# Altium PCB PCB1.PcbDoc (part 1 of 2)
Units mm, origin at the board's own origin, x right, y up, seen from the top; angles counter-clockwise.
Board outline 69.6 x 55 mm, 4 copper layers (Top Layer 1, Top Layer, Bottom Layer, Bottom Layer 1), stack 0.534 mm thick; 132 components, 100 nets, 446 pads, 41 vias.
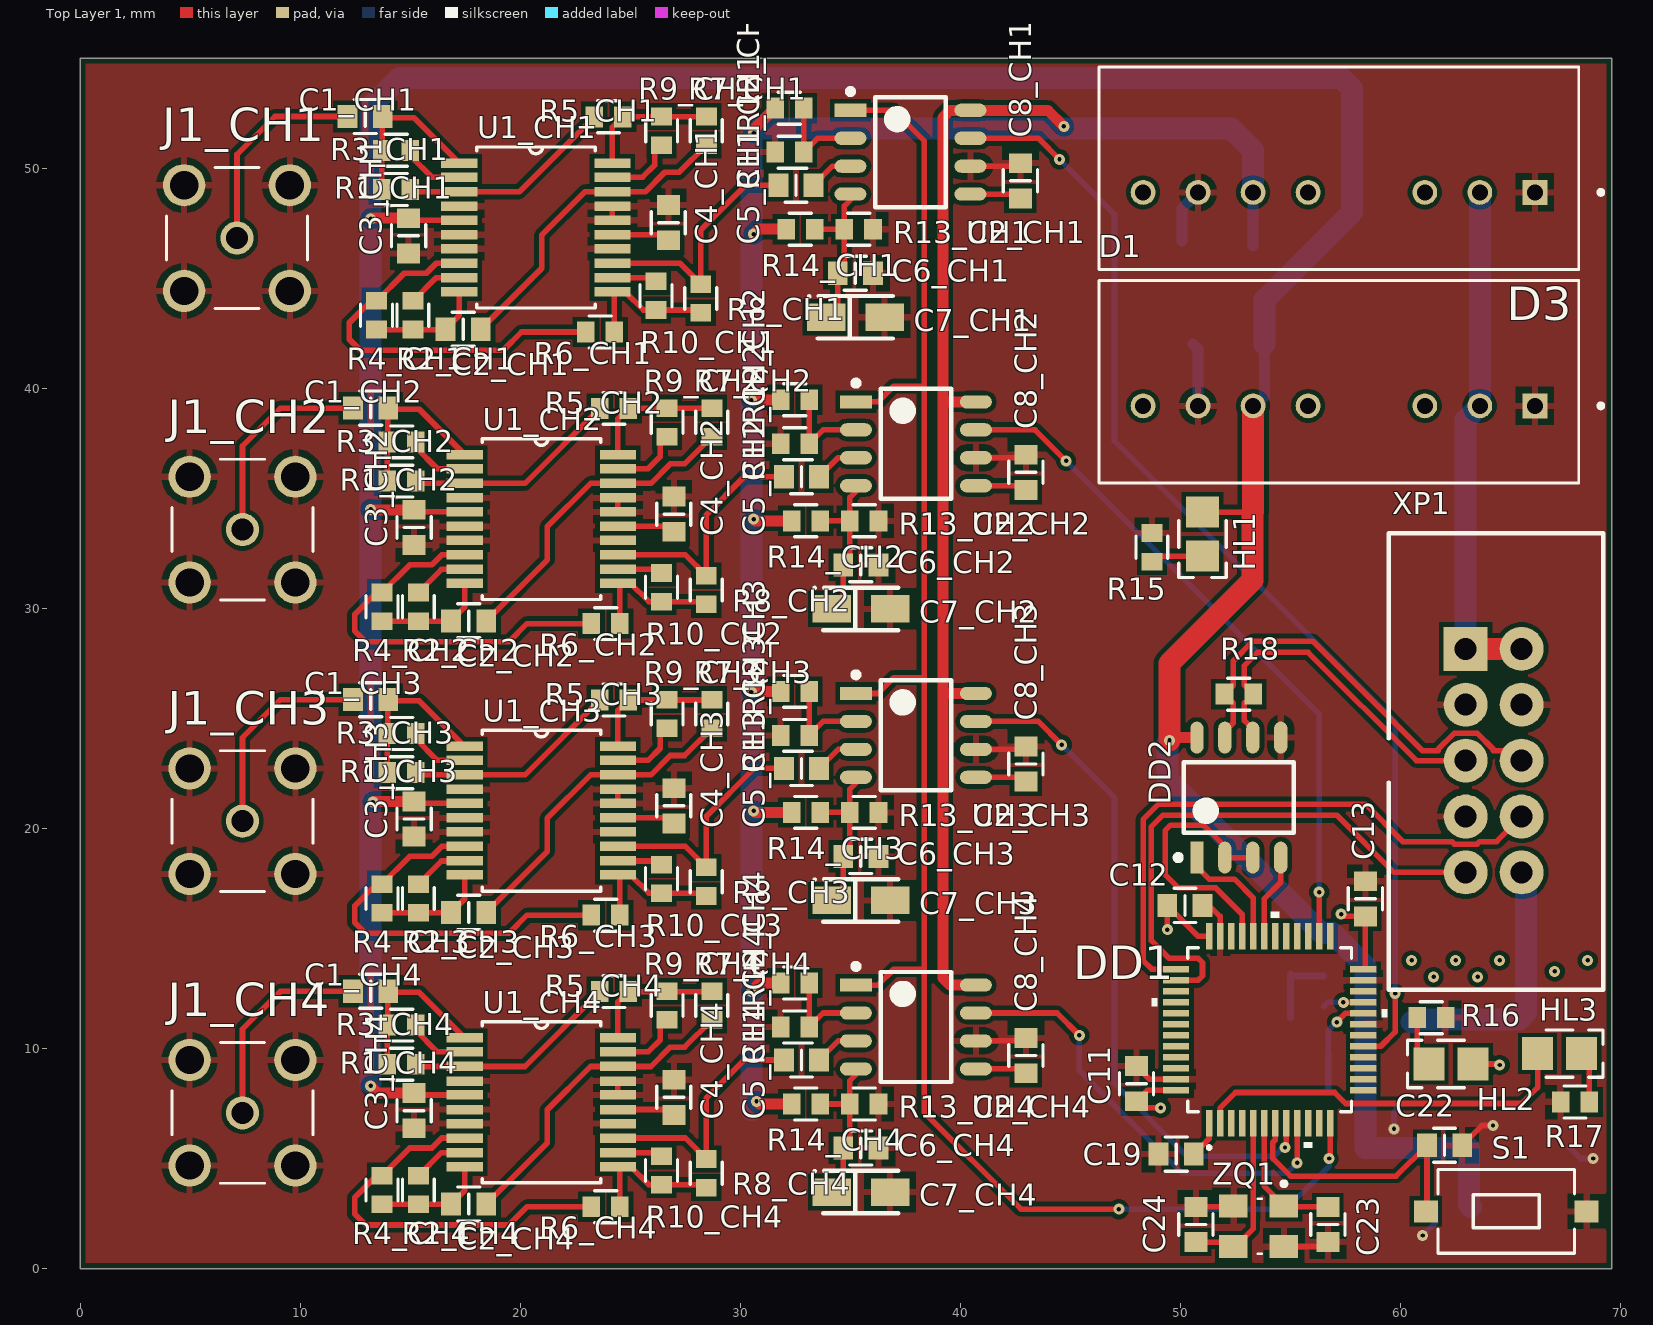
[diagram p0: Top Layer 1 view]
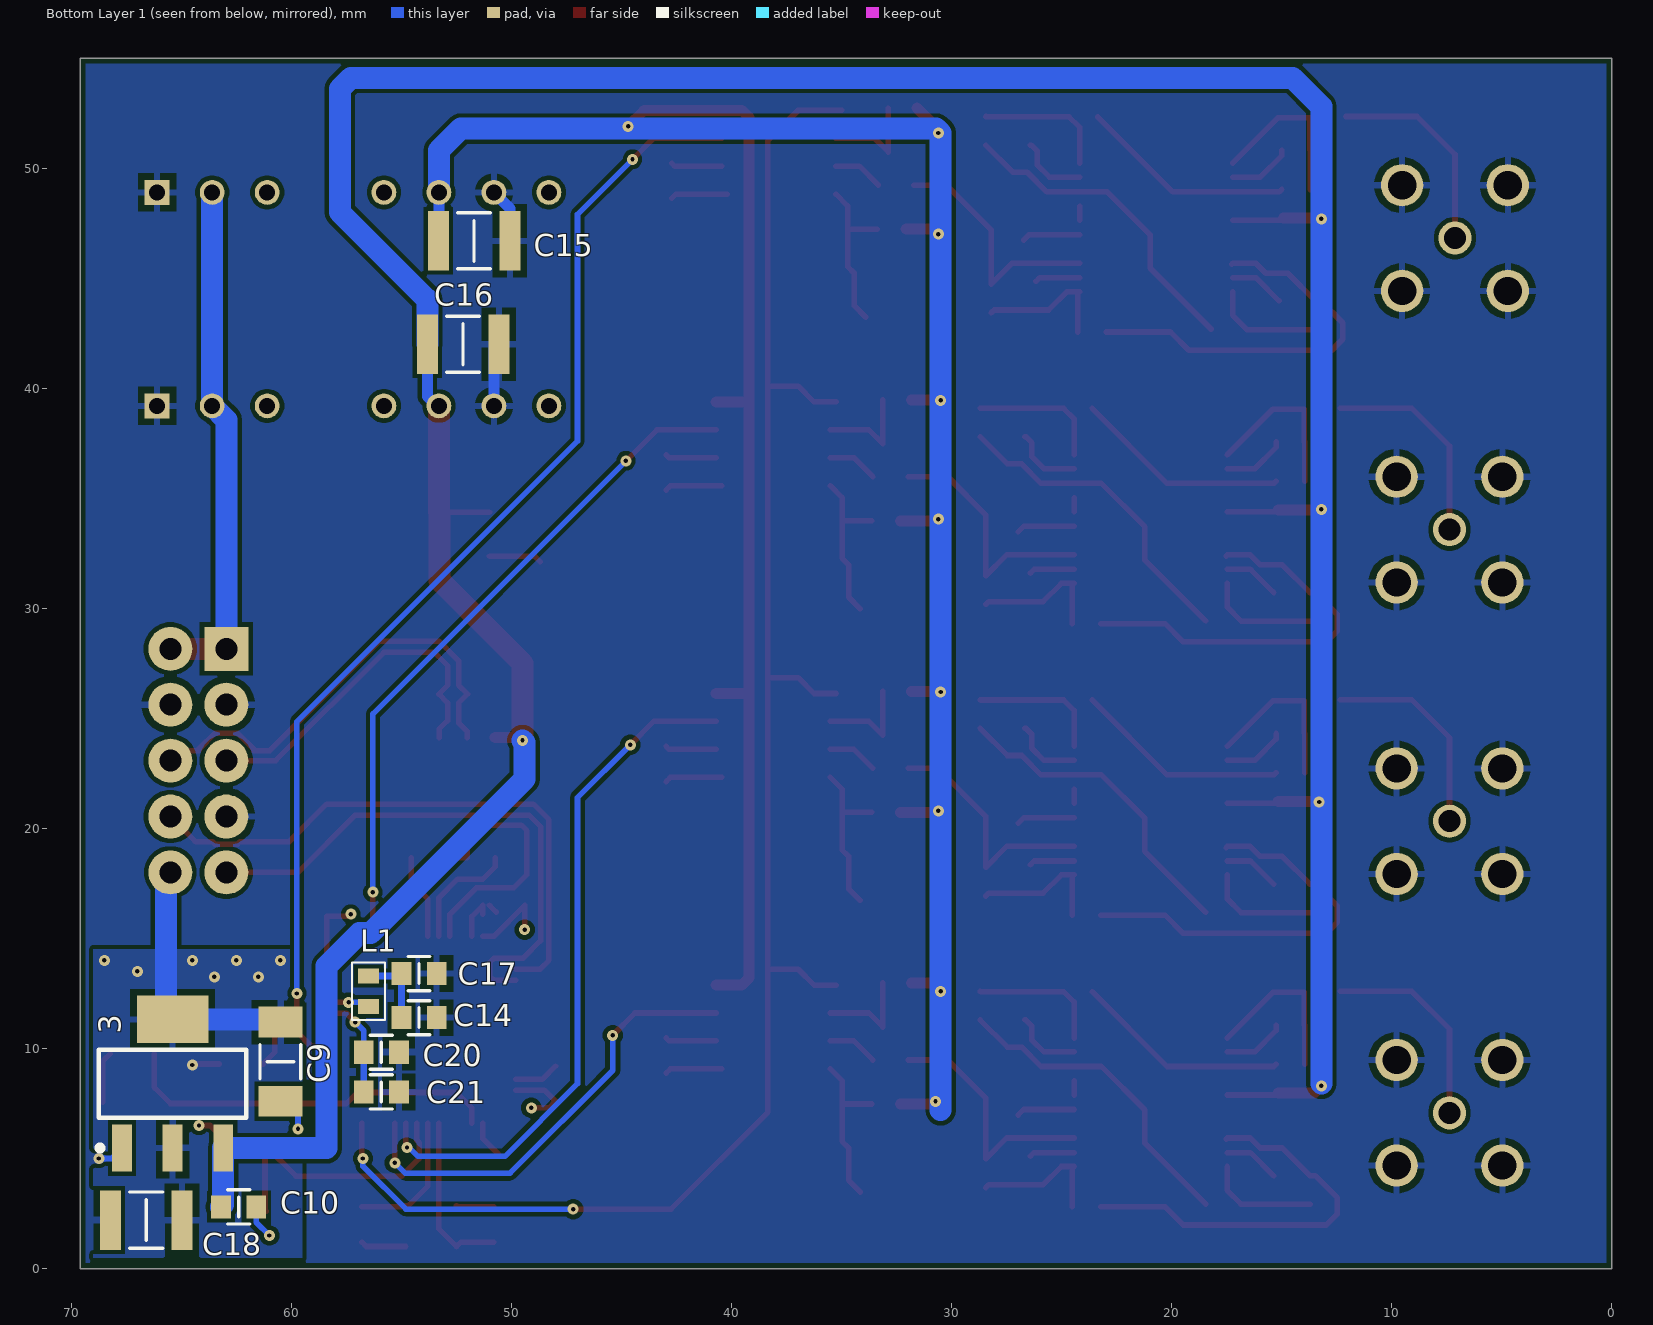
[diagram p1: Bottom Layer 1 view, seen from below]
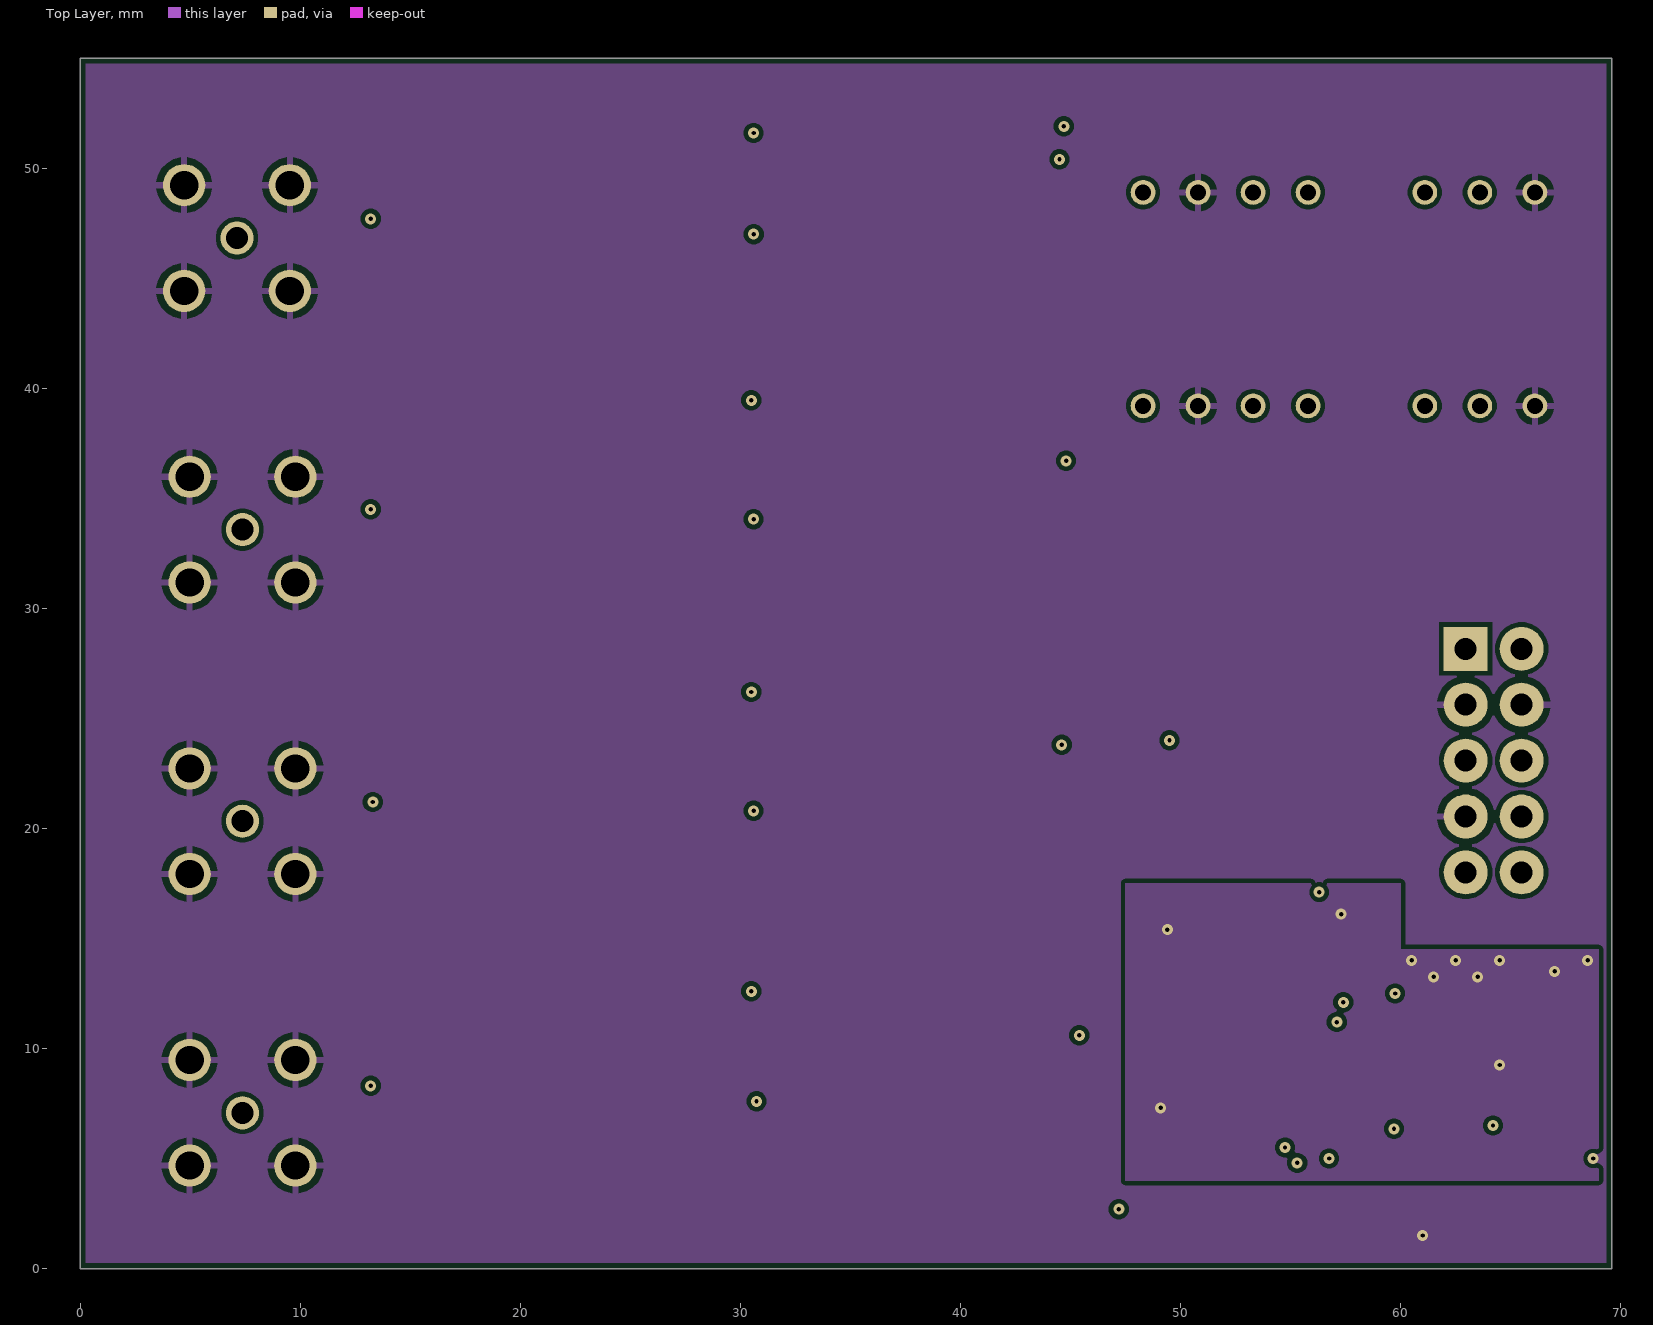
[diagram p2: Top Layer]
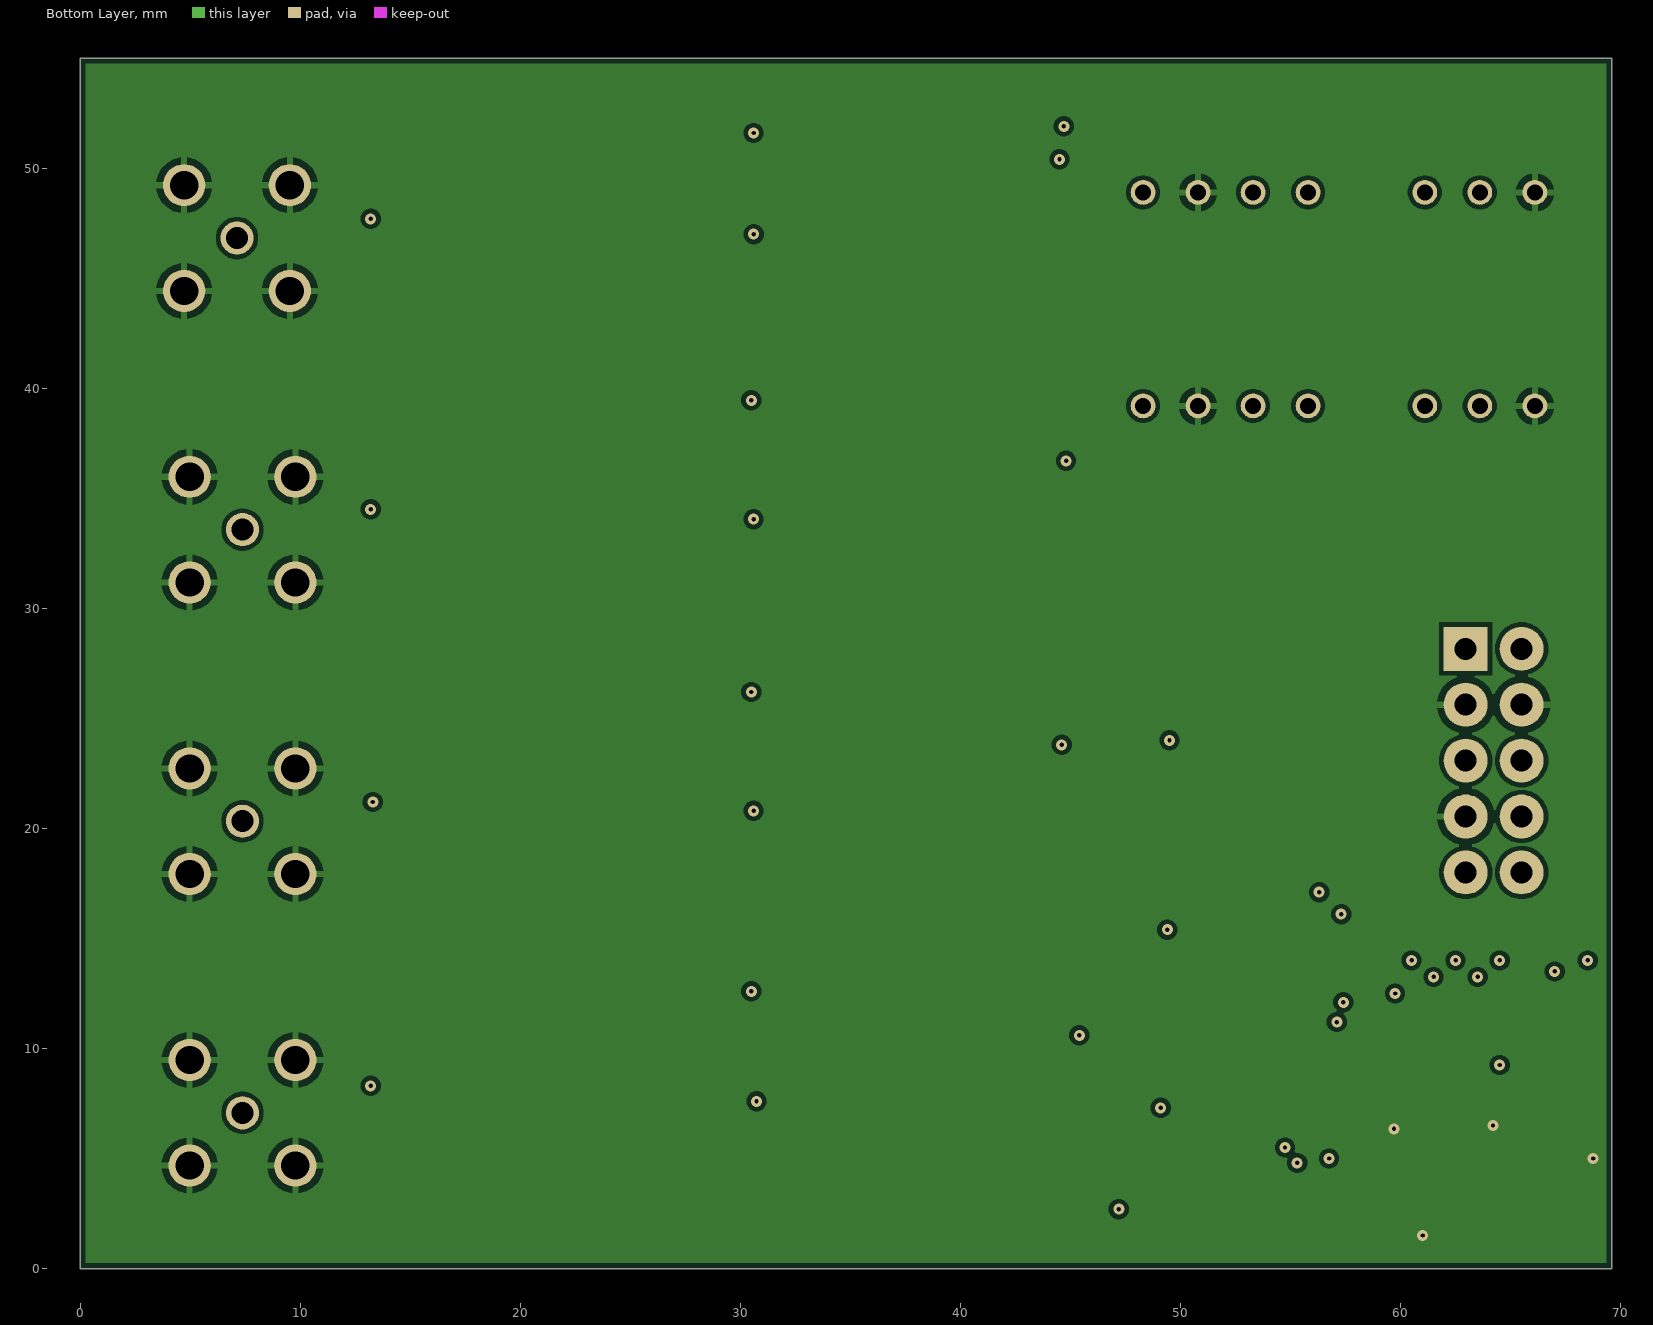
[diagram p3: Bottom Layer]
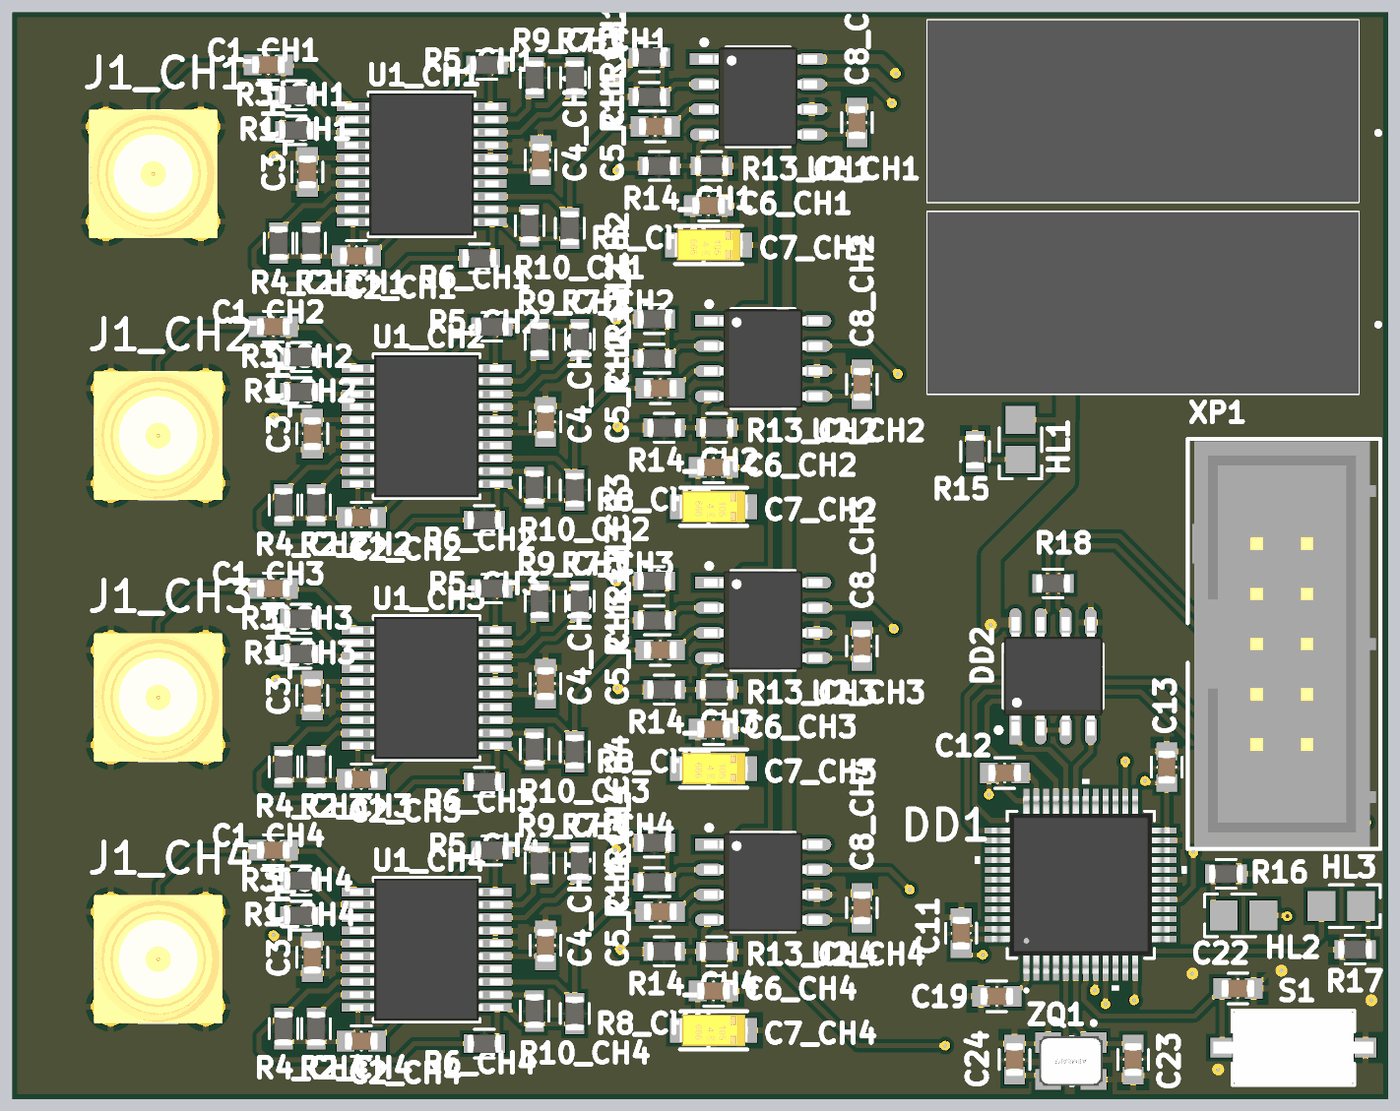
[diagram p5: 3D render of the assembled board from above, using the file's embedded part models]
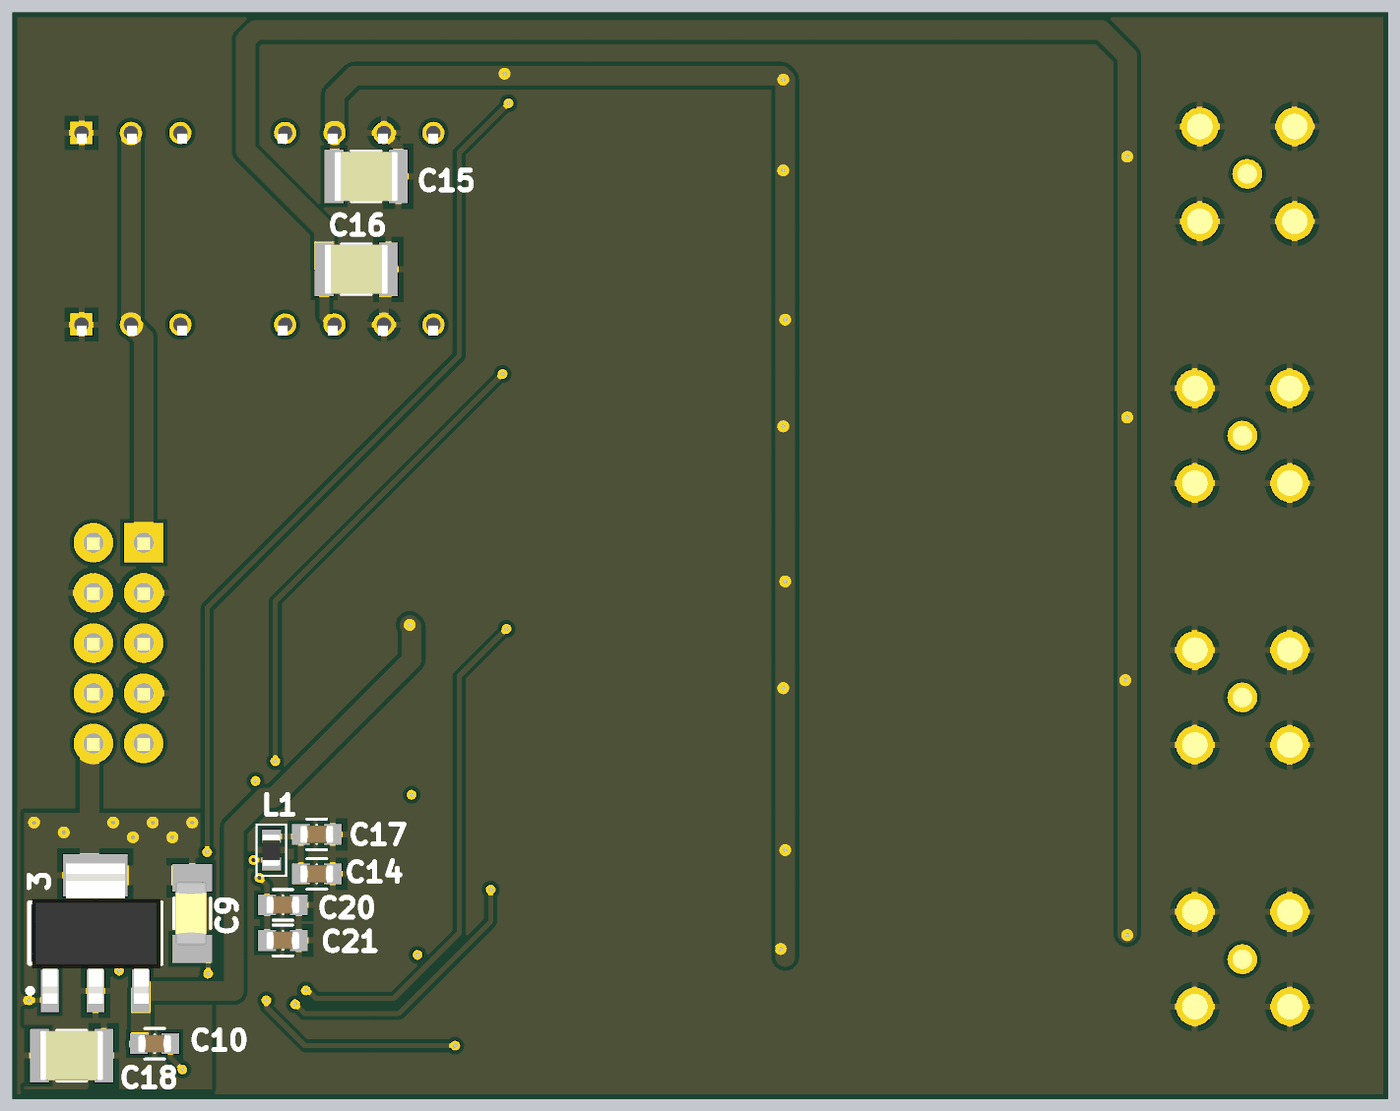
[diagram p6: 3D render of the assembled board from below, using the file's embedded part models]

## Layer stack, top to bottom
Top Solder: solder mask 0.0102, Solder Resist, Dk 3.5
Top Layer 1: signal copper 0.018
Dielectric 2: prepreg 0.0711, PP-006, Dk 4.1
Top Layer: signal copper 0.018
Dielectric 1: dielectric 0.32, FR-4, Dk 4.8
Bottom Layer: signal copper 0.018
Dielectric 3: prepreg 0.0711, PP-006, Dk 4.1
Bottom Layer 1: signal copper 0.018
Bottom Solder: solder mask 0.0102, Solder Resist, Dk 3.5

## Board outline
0,0 69.6,0 69.6,55 0,55

## Design rules (kind name [scope] priority, off if disabled: settings)
AcuteAngle [All] p1: minimum=3.50000000000000E+0001 checktracksonly=FALSE
BoardOutlineClearance "BoardOutlineClearance 1" [All] p1: gap=0.25 ignorepadtopadclearanceinfootprint=FALSE except(0: Arc-SplitContinuation Track-SplitContinuation SMDPad-SplitContinuation THPad-SplitContinuation Via-SplitContinuation Fill-SplitContinuation Poly-SplitContinuation Region-SplitContinuation Text-SplitContinuation) // Milling
BoardOutlineClearance "BoardOutlineClearance 2" [All] p2: gap=0.4 ignorepadtopadclearanceinfootprint=FALSE except(0: Arc-SplitContinuation Track-SplitContinuation SMDPad-SplitContinuation THPad-SplitContinuation Via-SplitContinuation Fill-SplitContinuation Poly-SplitContinuation Region-SplitContinuation Text-SplitContinuation) // V-Cut
Clearance "Clearance-1 1/2 Oz" [All] p1: gap=0.125 ignorepadtopadclearanceinfootprint=FALSE except(0.2: Arc-Fill Arc-Poly Track-Fill Track-Poly SMDPad-SMDPad SMDPad-Fill SMDPad-Poly THPad-Fill THPad-Poly Via-Fill Via-Poly Fill-Fill Fill-Poly Poly-Poly Poly-Region Poly-Text; 0.25: Arc-Hole Track-Hole SMDPad-Hole THPad-Hole Via-Hole Fill-Hole Poly-Hole Region-Hole Text-Hole) // Standart
DiffPairsRouting "DiffPairsRouting 1 Oz" [All] p1: maxlimit=0.254 minlimit=0.2 mostfreqgap=0.254 toplayer_minwidth=0.2 toplayer_maxwidth=0.381 toplayer_prefwidth=0.381 midlayer1_minwidth=0.2 midlayer1_maxwidth=0.381 midlayer1_prefwidth=0.381 midlayer2_minwidth=0.2 midlayer2_maxwidth=0.381 midlayer2_prefwidth=0.381 bottomlayer_minwidth=0.2 bottomlayer_maxwidth=0.381 bottomlayer_prefwidth=0.381 maxuncoupledlength=12.7
DiffPairsRouting "DiffPairsRouting 1/2 Oz" [All] p2: maxlimit=0.254 minlimit=0.1 mostfreqgap=0.254 toplayer_minwidth=0.1 toplayer_maxwidth=0.381 toplayer_prefwidth=0.381 midlayer1_minwidth=0.1 midlayer1_maxwidth=0.381 midlayer1_prefwidth=0.381 midlayer2_minwidth=0.1 midlayer2_maxwidth=0.381 midlayer2_prefwidth=0.381 bottomlayer_minwidth=0.1 bottomlayer_maxwidth=0.381 bottomlayer_prefwidth=0.381 maxuncoupledlength=12.7
HoleSize "Minimum HoleSize VIA 1" [IsVia] p1: absolutevalues=TRUE maxlimit=5.9 minlimit=0.2 maxpercent=80.000 minpercent=20.000 // Standart
HoleToHoleClearance Hole2HoleClearance [All] p1: gap=0.25 allowstackedmicrovias=FALSE
MinimumAnnularRing "Minimum AR VIA Standart" [IsVia] p1: minimumring=0.15
MinimumAnnularRing "Minimum AR PAD Standart" [IsPAD] p2: minimumring=0.2
MinimumAnnularRing "Minimum AR VIA Advance" [IsVia] p3: minimumring=0.1
MinimumAnnularRing "Minimum AR PAD Advance" [IsPAD] p4: minimumring=0.15
MinimumSolderMaskSliver "SolderMask Bridge Standart" [All] p1: minsoldermaskwidth=0.15 // All Masks
MinimumSolderMaskSliver "SolderMask Bridge Advance" [All] p2: minsoldermaskwidth=0.1 // Mask LDI
PlaneClearance "PlaneClearance 3 Oz" [All] p1 off: clearance=0.35
PlaneClearance "PlaneClearance 2 Oz" [All] p2: clearance=0.3
PlaneClearance "PlaneClearance 1 Oz" [All] p3: clearance=0.2
PlaneClearance "PlaneClearance-1 1/2 Oz" [All] p4: clearance=0.2 // Standart
PlaneClearance "PlaneClearance-2 1/2 Oz" [All] p5: clearance=0.15 // Advance
PlaneConnect "TermalConnect 3 Oz" [All] p1 off: planeconnectstyle=Relief reliefexpansion=0.2 reliefentries=4 reliefconductorwidth=0.35 reliefairgap=0.35 // Standart
PlaneConnect "TermalConnect 2 Oz" [All] p2: planeconnectstyle=Relief reliefexpansion=0.2 reliefentries=4 reliefconductorwidth=0.3 reliefairgap=0.3 // Standart
PlaneConnect "TermalConnect-1 1 Oz" [All] p3: planeconnectstyle=Relief reliefexpansion=0.2 reliefentries=4 reliefconductorwidth=0.2 reliefairgap=0.2 // Standart
PlaneConnect "TermalConnect-2 1 Oz" [All] p4: pad.planeconnectstyle=Relief pad.reliefexpansion=0.15 pad.reliefentries=4 pad.reliefconductorwidth=0.2 pad.reliefairgap=0.2 via.planeconnectstyle=Direct via.reliefexpansion=0.15 via.reliefentries=4 via.reliefconductorwidth=0.15 via.reliefairgap=0.15 // Advance
PlaneConnect "TermalConnect-1 1/2 Oz" [All] p5: planeconnectstyle=Relief reliefexpansion=0.2 reliefentries=4 reliefconductorwidth=0.2 reliefairgap=0.2 // Standart
PlaneConnect "TermalConnect-2 1/2 Oz" [All] p6: pad.planeconnectstyle=Relief pad.reliefexpansion=0.15 pad.reliefentries=4 pad.reliefconductorwidth=0.15 pad.reliefairgap=0.15 via.planeconnectstyle=Direct via.reliefexpansion=0.15 via.reliefentries=4 via.reliefconductorwidth=0.15 via.reliefairgap=0.15 // Advance
PolygonConnect "PolygonConnect 3 Oz" [All] p1 off: thpad.connectstyle=Relief thpad.reliefconductorwidth=0.35 thpad.reliefentries=4 thpad.polygonreliefangle="90 Angle" thpad.airgapwidth=0.35 smdpad.connectstyle=Relief smdpad.reliefconductorwidth=0.35 smdpad.reliefentries=4 smdpad.polygonreliefangle="90 Angle" smdpad.airgapwidth=0.35 via.connectstyle=Direct via.reliefconductorwidth=0.254 via.reliefentries=4 via.polygonreliefangle="90 Angle" via.airgapwidth=0.254
PolygonConnect "PolygonConnect 2 Oz" [All] p2: thpad.connectstyle=Relief thpad.reliefconductorwidth=0.3 thpad.reliefentries=4 thpad.polygonreliefangle="90 Angle" thpad.airgapwidth=0.3 smdpad.connectstyle=Relief smdpad.reliefconductorwidth=0.3 smdpad.reliefentries=4 smdpad.polygonreliefangle="90 Angle" smdpad.airgapwidth=0.3 via.connectstyle=Direct via.reliefconductorwidth=0.254 via.reliefentries=4 via.polygonreliefangle="90 Angle" via.airgapwidth=0.254
PolygonConnect "PolygonConnect-1 1 Oz" [All] p3: thpad.connectstyle=Relief thpad.reliefconductorwidth=0.2 thpad.reliefentries=4 thpad.polygonreliefangle="90 Angle" thpad.airgapwidth=0.2 smdpad.connectstyle=Relief smdpad.reliefconductorwidth=0.2 smdpad.reliefentries=4 smdpad.polygonreliefangle="90 Angle" smdpad.airgapwidth=0.2 via.connectstyle=Direct via.reliefconductorwidth=0.254 via.reliefentries=4 via.polygonreliefangle="90 Angle" via.airgapwidth=0.254 // Standart
PolygonConnect "PolygonConnect-2 1 Oz" [All] p4: thpad.connectstyle=Relief thpad.reliefconductorwidth=0.15 thpad.reliefentries=4 thpad.polygonreliefangle="90 Angle" thpad.airgapwidth=0.15 smdpad.connectstyle=Relief smdpad.reliefconductorwidth=0.15 smdpad.reliefentries=4 smdpad.polygonreliefangle="90 Angle" smdpad.airgapwidth=0.15 via.connectstyle=Direct via.reliefconductorwidth=0.254 via.reliefentries=4 via.polygonreliefangle="90 Angle" via.airgapwidth=0.254 // Advance
PolygonConnect "PolygonConnect-1 1/2 Oz" [All] p5: thpad.connectstyle=Relief thpad.reliefconductorwidth=0.15 thpad.reliefentries=4 thpad.polygonreliefangle="90 Angle" thpad.airgapwidth=0.2 smdpad.connectstyle=Relief smdpad.reliefconductorwidth=0.2 smdpad.reliefentries=4 smdpad.polygonreliefangle="90 Angle" smdpad.airgapwidth=0.2 via.connectstyle=Direct via.reliefconductorwidth=0.254 via.reliefentries=4 via.polygonreliefangle="90 Angle" via.airgapwidth=0.254 // Standart
PolygonConnect "PolygonConnect-2 1/2 Oz" [All] p6: thpad.connectstyle=Relief thpad.reliefconductorwidth=0.125 thpad.reliefentries=4 thpad.polygonreliefangle="90 Angle" thpad.airgapwidth=0.15 smdpad.connectstyle=Relief smdpad.reliefconductorwidth=0.125 smdpad.reliefentries=4 smdpad.polygonreliefangle="90 Angle" smdpad.airgapwidth=0.15 via.connectstyle=Direct via.reliefconductorwidth=0.254 via.reliefentries=4 via.polygonreliefangle="90 Angle" via.airgapwidth=0.254 // Advance
RoomDefinition CH3 [InComponentClass('CH3')] p1: confinementstyle=ConfineIn formatcopy=TRUE lockcomponents=FALSE outline 3.454,14.85 44.204,14.85 44.204,27.6 3.454,27.6
RoomDefinition CH4 [InComponentClass('CH4')] p2: confinementstyle=ConfineIn formatcopy=TRUE lockcomponents=FALSE outline 3.454,1.6 44.204,1.6 44.204,14.35 3.454,14.35
RoomDefinition CH1 [InComponentClass('CH1')] p3: confinementstyle=ConfineIn formatcopy=TRUE lockcomponents=FALSE outline 3.204,41.35 43.954,41.35 43.954,54.1 3.204,54.1
RoomDefinition CH2 [InComponentClass('CH2')] p4: confinementstyle=ConfineIn formatcopy=TRUE lockcomponents=FALSE outline 3.454,28.1 44.204,28.1 44.204,40.85 3.454,40.85
RoutingCorners [All] p1 off: cornerstyle=45-Degree minsetback=2.54 maxsetback=2.54
RoutingVias [All] p1: holewidth=0.3 width=0.6 viastyle="Through Hole" minholewidth=0.2 minwidth=0.4 maxholewidth=5.9 maxwidth=6.4
SilkToSilkClearance Silk2SilkClearance [All] p1 off: silktosilkclearance=0.15
SilkToSolderMaskClearance Silk2SolderMaskClearance [IsPad] p1 off: minsilkscreentomaskgap=0.15 clearancetoexposedcopper=TRUE
SolderMaskExpansion SolderMaskExpansion-1 [All] p1: expansion=0.05 istentingtop=FALSE // Standart
SupplyNets "Schematic Supply Nets_6" [InNet('+3,3В')] p1: voltage=0.000
SupplyNets "Schematic Supply Nets_4" [InNet('+16В')] p2: voltage=0.000
SupplyNets "Schematic Supply Nets_3" [InNet('AGND')] p3: voltage=0.000
SupplyNets "Schematic Supply Nets_1" [InNet('+12В')] p4: voltage=0.000
SupplyNets "Schematic Supply Nets" [InNet('+5В')] p5: voltage=0.000
UnRoutedNet [All] p1: checkbadconnections=TRUE
Width "Width 1/2 Oz" [All] p1: maxlimit=10 minlimit=0.1 preferedwidth=0.125 checkconnectedcopper=TRUE
20 further rules are at their usual default settings.

## Classes and differential pairs
component class Main: 3 C9 C10 C11 C12 C13 C14 C15 C16 C17 C18 C19 C20 C21 C22 C23 C24 D1 D3 DD1 DD2 HL1 HL2 HL3 L1 R15 R16 R17 R18 S1 XP1 ZQ1
channel class Chanel: CH1 CH2 CH3 CH4
component class CH4: C1_CH4 C2_CH4 C3_CH4 C4_CH4 C5_CH4 C6_CH4 C7_CH4 C8_CH4 J1_CH4 R1_CH4 R2_CH4 R3_CH4 R4_CH4 R5_CH4 R6_CH4 R7_CH4 R8_CH4 R9_CH4 R10_CH4 R11_CH4 R12_CH4 R13_CH4 R14_CH4 U1_CH4 U2_CH4
component class CH3: C1_CH3 C2_CH3 C3_CH3 C4_CH3 C5_CH3 C6_CH3 C7_CH3 C8_CH3 J1_CH3 R1_CH3 R2_CH3 R3_CH3 R4_CH3 R5_CH3 R6_CH3 R7_CH3 R8_CH3 R9_CH3 R10_CH3 R11_CH3 R12_CH3 R13_CH3 R14_CH3 U1_CH3 U2_CH3
component class CH2: C1_CH2 C2_CH2 C3_CH2 C4_CH2 C5_CH2 C6_CH2 C7_CH2 C8_CH2 J1_CH2 R1_CH2 R2_CH2 R3_CH2 R4_CH2 R5_CH2 R6_CH2 R7_CH2 R8_CH2 R9_CH2 R10_CH2 R11_CH2 R12_CH2 R13_CH2 R14_CH2 U1_CH2 U2_CH2
component class CH1: C1_CH1 C2_CH1 C3_CH1 C4_CH1 C5_CH1 C6_CH1 C7_CH1 C8_CH1 J1_CH1 R1_CH1 R2_CH1 R3_CH1 R4_CH1 R5_CH1 R6_CH1 R7_CH1 R8_CH1 R9_CH1 R10_CH1 R11_CH1 R12_CH1 R13_CH1 R14_CH1 U1_CH1 U2_CH1
differential pair RS485: +RS485_P -RS485_N

## Components (designator, comment, footprint, x,y, rotation, side; value= is the part's Value field where it differs from the comment)
3 "LD1117S33CTR" SOT223 65.4,8.4 r90 bottom (schematic designator D2)
C1_CH1 "Capacitor" 0603C 12.954,52.35 r0 top value=15.8п (schematic designator C1)
C1_CH2 "Capacitor" 0603C 13.204,39.1 r0 top value=15.8п (schematic designator C1)
C1_CH3 "Capacitor" 0603C 13.204,25.85 r0 top value=15.8п (schematic designator C1)
C1_CH4 "Capacitor" 0603C 13.204,12.6 r0 top value=15.8п (schematic designator C1)
C2_CH1 "Capacitor" 0603C 17.405,42.683 r180 top value=15.8п (schematic designator C2)
C2_CH2 "Capacitor" 0603C 17.655,29.433 r180 top value=15.8п (schematic designator C2)
C2_CH3 "Capacitor" 0603C 17.655,16.183 r180 top value=15.8п (schematic designator C2)
C2_CH4 "Capacitor" 0603C 17.655,2.933 r180 top value=15.8п (schematic designator C2)
C3_CH1 "Capacitor" 0603C 14.927,46.927 r90 top value="0,1 мк" (schematic designator C3)
C3_CH2 "Capacitor" 0603C 15.177,33.677 r90 top value="0,1 мк" (schematic designator C3)
C3_CH3 "Capacitor" 0603C 15.177,20.427 r90 top value="0,1 мк" (schematic designator C3)
C3_CH4 "Capacitor" 0603C 15.177,7.177 r90 top value="0,1 мк" (schematic designator C3)
C4_CH1 "Capacitor" 0603C 26.727,47.527 r270 top value="1 мк" (schematic designator C4)
C4_CH2 "Capacitor" 0603C 26.977,34.277 r270 top value="1 мк" (schematic designator C4)
C4_CH3 "Capacitor" 0603C 26.977,21.027 r270 top value="1 мк" (schematic designator C4)
C4_CH4 "Capacitor" 0603C 26.977,7.777 r270 top value="1 мк" (schematic designator C4)
C5_CH1 "Capacitor" 0603C 32.527,49.227 r0 top value="0,1 мк" (schematic designator C5)
C5_CH2 "Capacitor" 0603C 32.777,35.977 r0 top value="0,1 мк" (schematic designator C5)
C5_CH3 "Capacitor" 0603C 32.777,22.727 r0 top value="0,1 мк" (schematic designator C5)
C5_CH4 "Capacitor" 0603C 32.777,9.477 r0 top value="0,1 мк" (schematic designator C5)
C6_CH1 "Capacitor" 0603C 35.227,45.227 r0 top value="0,1 мк" (schematic designator C6)
C6_CH2 "Capacitor" 0603C 35.477,31.977 r0 top value="0,1 мк" (schematic designator C6)
C6_CH3 "Capacitor" 0603C 35.477,18.727 r0 top value="0,1 мк" (schematic designator C6)
C6_CH4 "Capacitor" 0603C 35.477,5.477 r0 top value="0,1 мк" (schematic designator C6)
C7_CH1 "Capacitor" TC_A 35.227,43.227 r0 top value="100 мк" (schematic designator C7)
C7_CH2 "Capacitor" TC_A 35.477,29.977 r0 top value="100 мк" (schematic designator C7)
C7_CH3 "Capacitor" TC_A 35.477,16.727 r0 top value="100 мк" (schematic designator C7)
C7_CH4 "Capacitor" TC_A 35.477,3.477 r0 top value="100 мк" (schematic designator C7)
C8_CH1 "Capacitor" 0603C 42.727,49.427 r270 top value=15.8п (schematic designator C8)
C8_CH2 "Capacitor" 0603C 42.977,36.177 r270 top value=15.8п (schematic designator C8)
C8_CH3 "Capacitor" 0603C 42.977,22.927 r270 top value=15.8п (schematic designator C8)
C8_CH4 "Capacitor" 0603C 42.977,9.677 r270 top value=15.8п (schematic designator C8)
C9 "Capacitor" 1206C 60.5,9.4 r90 bottom value="4,7 мк"
C10 "Capacitor" 0603C 62.4,2.8 r0 bottom value="0,1 мк"
C11 "Capacitor" 0603C 48,8.4 r270 top value="0,1 мк"
C12 "Capacitor" 0603C 50.2,16.5 r180 top value="0,1 мк"
C13 "Capacitor" 0603C 58.4,16.8 r270 top value="0,1 мк"
C14 "Capacitor" 0603C 54.2,11.4 r0 bottom value="1 мк"
C15 "Capacitor" 1210C 51.7,46.7 r0 bottom value="10 мк"
C16 "Capacitor" 1210C 52.2,42 r0 bottom value="10 мк"
C17 "Capacitor" 0603C 54.2,13.4 r0 bottom value="0,1 мк"
C18 "Capacitor" 1210C 66.6,2.2 r180 bottom value="10 мк"
C19 "Capacitor" 0603C 49.8,5.2 r0 top value="1 мк"
C20 "Capacitor" 0603C 55.914,9.828 r0 bottom value="1 мк"
C21 "Capacitor" 0603C 55.914,8.028 r0 bottom value="0,1 мк"
C22 "Capacitor" 0603C 62,5.6 r180 top value="0,1 мк"
C23 "Capacitor" 0603C 56.7,2 r90 top value="12 п"
C24 "Capacitor" 0603C 50.7,2 r270 top value="12 п"
D1 "SPBW06F-5" CONV_SPBW06F-12 57.2,40.3 r180 top
D3 "SPBW06F-12" CONV_SPBW06F-12 57.2,50 r180 top
DD1 "STM32G473CBTx" LQFP48-7x7mm 54.05,10.85 r90 top locked value=Value
DD2 "MAX485CSA" SOIC-8 52.65,21.4 r90 top
HL1 "LED" 0805D 51,33.373 r270 top
HL2 "LED" 0805D 62.292,9.295 r180 top
HL3 "LED" 0805D 67.226,9.768 r0 top
J1_CH1 "SMA_CONNECTOR" SMA_CONNECTOR 7.127,46.827 r90 top (schematic designator J1)
J1_CH2 "SMA_CONNECTOR" SMA_CONNECTOR 7.377,33.577 r90 top (schematic designator J1)
J1_CH3 "SMA_CONNECTOR" SMA_CONNECTOR 7.377,20.327 r90 top (schematic designator J1)
J1_CH4 "SMA_CONNECTOR" SMA_CONNECTOR 7.377,7.077 r90 top (schematic designator J1)
L1 "FCM1608KF-601T05" 0603L 56.5,12.6 r270 bottom
R1_CH1 "Resistor" 0603R 14.357,49.033 r0 top value="100 к" (schematic designator R1)
R1_CH2 "Resistor" 0603R 14.607,35.783 r0 top value="100 к" (schematic designator R1)
R1_CH3 "Resistor" 0603R 14.607,22.533 r0 top value="100 к" (schematic designator R1)
R1_CH4 "Resistor" 0603R 14.607,9.283 r0 top value="100 к" (schematic designator R1)
R2_CH1 "Resistor" 0603R 15.119,43.318 r90 top value="100 к" (schematic designator R2)
R2_CH2 "Resistor" 0603R 15.369,30.068 r90 top value="100 к" (schematic designator R2)
R2_CH3 "Resistor" 0603R 15.369,16.818 r90 top value="100 к" (schematic designator R2)
R2_CH4 "Resistor" 0603R 15.369,3.568 r90 top value="100 к" (schematic designator R2)
R3_CH1 "Resistor" 0603R 14.357,50.811 r0 top value="52.3 к" (schematic designator R3)
R3_CH2 "Resistor" 0603R 14.607,37.561 r0 top value="52.3 к" (schematic designator R3)
R3_CH3 "Resistor" 0603R 14.607,24.311 r0 top value="52.3 к" (schematic designator R3)
R3_CH4 "Resistor" 0603R 14.607,11.061 r0 top value="52.3 к" (schematic designator R3)
R4_CH1 "Resistor" 0603R 13.468,43.318 r90 top value="52.3 к" (schematic designator R4)
R4_CH2 "Resistor" 0603R 13.718,30.068 r90 top value="52.3 к" (schematic designator R4)
R4_CH3 "Resistor" 0603R 13.718,16.818 r90 top value="52.3 к" (schematic designator R4)
R4_CH4 "Resistor" 0603R 13.718,3.568 r90 top value="52.3 к" (schematic designator R4)
R5_CH1 "Resistor" 0603R 24.009,52.335 r0 top value="270 к" (schematic designator R5)
R5_CH2 "Resistor" 0603R 24.259,39.085 r0 top value="270 к" (schematic designator R5)
R5_CH3 "Resistor" 0603R 24.259,25.835 r0 top value="270 к" (schematic designator R5)
R5_CH4 "Resistor" 0603R 24.259,12.585 r0 top value="270 к" (schematic designator R5)
R6_CH1 "Resistor" 0603R 23.628,42.556 r0 top value="270 к" (schematic designator R6)
R6_CH2 "Resistor" 0603R 23.878,29.306 r0 top value="270 к" (schematic designator R6)
R6_CH3 "Resistor" 0603R 23.878,16.056 r0 top value="270 к" (schematic designator R6)
R6_CH4 "Resistor" 0603R 23.878,2.806 r0 top value="270 к" (schematic designator R6)
R7_CH1 "Resistor" 0603R 28.454,51.7 r90 top value="47.5 к" (schematic designator R7)
R7_CH2 "Resistor" 0603R 28.704,38.45 r90 top value="47.5 к" (schematic designator R7)
R7_CH3 "Resistor" 0603R 28.704,25.2 r90 top value="47.5 к" (schematic designator R7)
R7_CH4 "Resistor" 0603R 28.704,11.95 r90 top value="47.5 к" (schematic designator R7)
R8_CH1 "Resistor" 0603R 28.2,44.08 r270 top value="47.5 к" (schematic designator R8)
R8_CH2 "Resistor" 0603R 28.45,30.83 r270 top value="47.5 к" (schematic designator R8)
R8_CH3 "Resistor" 0603R 28.45,17.58 r270 top value="47.5 к" (schematic designator R8)
R8_CH4 "Resistor" 0603R 28.45,4.33 r270 top value="47.5 к" (schematic designator R8)
R9_CH1 "Resistor" 0603R 26.422,51.7 r90 top value="93.1 к" (schematic designator R9)
R9_CH2 "Resistor" 0603R 26.672,38.45 r90 top value="93.1 к" (schematic designator R9)
R9_CH3 "Resistor" 0603R 26.672,25.2 r90 top value="93.1 к" (schematic designator R9)
R9_CH4 "Resistor" 0603R 26.672,11.95 r90 top value="93.1 к" (schematic designator R9)
R10_CH1 "Resistor" 0603R 26.168,44.207 r270 top value="93.1 к" (schematic designator R10)
R10_CH2 "Resistor" 0603R 26.418,30.957 r270 top value="93.1 к" (schematic designator R10)
R10_CH3 "Resistor" 0603R 26.418,17.707 r270 top value="93.1 к" (schematic designator R10)
R10_CH4 "Resistor" 0603R 26.418,4.457 r270 top value="93.1 к" (schematic designator R10)
R11_CH1 "Resistor" 0603R 32.227,50.727 r0 top value="1,1 к" (schematic designator R11)
R11_CH2 "Resistor" 0603R 32.477,37.477 r0 top value="1,1 к" (schematic designator R11)
R11_CH3 "Resistor" 0603R 32.477,24.227 r0 top value="1,1 к" (schematic designator R11)
R11_CH4 "Resistor" 0603R 32.477,10.977 r0 top value="1,1 к" (schematic designator R11)
R12_CH1 "Resistor" 0603R 32.227,52.727 r180 top value="12 к" (schematic designator R12)
R12_CH2 "Resistor" 0603R 32.477,39.477 r180 top value="12 к" (schematic designator R12)
R12_CH3 "Resistor" 0603R 32.477,26.227 r180 top value="12 к" (schematic designator R12)
R12_CH4 "Resistor" 0603R 32.477,12.977 r180 top value="12 к" (schematic designator R12)
R13_CH1 "Resistor" 0603R 35.377,47.227 r180 top value="3,0 к" (schematic designator R13)
R13_CH2 "Resistor" 0603R 35.627,33.977 r180 top value="3,0 к" (schematic designator R13)
R13_CH3 "Resistor" 0603R 35.627,20.727 r180 top value="3,0 к" (schematic designator R13)
R13_CH4 "Resistor" 0603R 35.627,7.477 r180 top value="3,0 к" (schematic designator R13)
R14_CH1 "Resistor" 0603R 32.727,47.227 r180 top value="3,0 к" (schematic designator R14)
R14_CH2 "Resistor" 0603R 32.977,33.977 r180 top value="3,0 к" (schematic designator R14)
R14_CH3 "Resistor" 0603R 32.977,20.727 r180 top value="3,0 к" (schematic designator R14)
R14_CH4 "Resistor" 0603R 32.977,7.477 r180 top value="3,0 к" (schematic designator R14)
R15 "Resistor" 0603R 48.7,32.773 r270 top value="2,0 к"
R16 "Resistor" 0603R 61.4,11.4 r180 top value="1,0 к"
R17 "Resistor" 0603R 67.926,7.568 r0 top value="1,0 к"
R18 "Resistor" 0603R 52.65,26.1 r180 top value=120
S1 "TSS-TD-19XA-XTR" TSS-TD-19XA-XTR 64.8,2.6 r180 top
U1_CH1 "LTC1562CG" 20-SSOP 20.707,47.306 r0 top (schematic designator U1)
U1_CH2 "LTC1562CG" 20-SSOP 20.957,34.056 r0 top (schematic designator U1)
U1_CH3 "LTC1562CG" 20-SSOP 20.957,20.806 r0 top (schematic designator U1)
U1_CH4 "LTC1562CG" 20-SSOP 20.957,7.556 r0 top (schematic designator U1)
U2_CH1 "AD603ARZ-REEL-REEL7" SOIC-8 37.727,50.727 r0 top (schematic designator U2)
U2_CH2 "AD603ARZ-REEL-REEL7" SOIC-8 37.977,37.477 r0 top (schematic designator U2)
U2_CH3 "AD603ARZ-REEL-REEL7" SOIC-8 37.977,24.227 r0 top (schematic designator U2)
U2_CH4 "AD603ARZ-REEL-REEL7" SOIC-8 37.977,10.977 r0 top (schematic designator U2)
XP1 "IDC-10" IDC-10 64.21,23.085 r0 top
ZQ1 "XTAL_GND" QSMD3.2x2.5 54.7,2.85 r270 top value="8 МГц"

## Footprints (in the part's own frame and the unit in brackets; to place one, negate y for a bottom-side part, rotate by r counter-clockwise, add the part's x,y. Pads: shape width x height; smd on the part's side, far side on the other; paste and mask are expansions set on the pad)
20-SSOP [mil]
  rect 65x17 smd: 1(-137,115) 2(-137,90) 3(-137,64) 4(-137,38) 5(-137,13) 6(-137,-13) 7(-137,-38) 8(-137,-64) 9(-137,-90) 10(-137,-115) 11(137,-115) 12(137,-90) 13(137,-64) 14(137,-38) 15(137,-13) 16(137,13) 17(137,38) 18(137,64) 19(137,90) 20(137,115)
  silkscreen extent -106,-144 106,144, body extent -153,-142 153,142, height 78
0603C [mm] "Chip Resistor, 2-Leads, Body 1,40x0,80mm, IPC Medium Density"
  rect 0.9x1.05 smd: 1(-0.8,0) 2(0.8,0)
  silkscreen extent -0.5,-0.78 0.5,0.77, body extent -0.85,-0.45 0.85,0.45, height 0.9
0603L [mm] "Chip Inductor, 2-Leads, Body 1,55x0,85mm, IPC Medium Density"
  rect 0.67x0.97 smd: 1(-0.695,0) 2(0.695,0)
  silkscreen extent -1.3,-0.75 1.3,0.75, body extent -0.8,-0.45 0.8,0.45, height 0.45
0603R [mm] "Chip Resistor, 2-Leads, Body 1.60x0.85mm, IPC Medium Density"
  rect 0.8x0.95 smd: 1(-0.65,0) 2(0.65,0)
  silkscreen extent -0.5,-0.72 0.5,0.72, body extent -0.87,-0.47 0.88,0.48, height 0.9
0805D [mm]
  rect 1.4x1.5 smd: 1(-1,0) 2(1,0)
  silkscreen extent -0.6,-1.07 1.97,1.07, body extent -1.07,-0.7 1.07,0.7, height 0.7
1206C [mm]
  rect 1.4x2 smd paste+0 mask+0.03: 1(-1.8,0)
  rect 1.4x2 smd paste+0: 2(1.8,0)
  silkscreen extent -0.77,-0.92 0.77,0.92, body extent -1.6,-0.74 1.6,0.86, height 1.59
1210C [mm]
  rect 0.954x2.706 smd paste+0: 1(-1.625,0) 2(1.625,0)
  silkscreen extent -0.75,-1.28 0.75,1.28, body extent -1.6,-1.25 1.6,1.25, height 2.7
CONV_SPBW06F-12 [mm]
  rect 1.13x1.13 / inner round 1.13 / far side rect 1.13x1.13 hole 0.73: 1(-8.9,1.1)
  round 1.13 hole 0.73: 2(-6.4,1.1) 3(-3.9,1.1) 5(1.4,1.1) 6(3.9,1.1) 7(6.4,1.1) 8(8.9,1.1)
  silkscreen extent -12,-4.6 10.9,4.6, body extent -10.9,-4.6 10.9,4.6, height 11.1
IDC-10 [mm] "IDC-10 Male Connector"
  rect 2x2 hole 1: 1(-1.25,5.075)
  round 2 hole 1: 2(1.29,5.075) 3(-1.25,2.535) 4(1.29,2.535) 5(-1.25,-0.005) 6(1.29,-0.005) 7(-1.25,-2.545) 8(1.29,-2.545) 9(-1.25,-5.085) 10(1.29,-5.085)
  silkscreen extent -4.75,-10.42 5,10.32, body extent -4.53,-10.31 4.77,10.19, height 9.1
LQFP48-7x7mm [mm]
  rect 1.194x0.3 smd paste+0 mask+0.025: 1(-4.25,2.75) 2(-4.25,2.25) 3(-4.25,1.75) 4(-4.25,1.25) 5(-4.25,0.75) 6(-4.25,0.25) 7(-4.25,-0.25) 8(-4.25,-0.75) 9(-4.25,-1.25) 10(-4.25,-1.75) 11(-4.25,-2.25) 12(-4.25,-2.75) 25(4.25,-2.75) 26(4.25,-2.25) 27(4.25,-1.75) 28(4.25,-1.25) 29(4.25,-0.75) 30(4.25,-0.25) 31(4.25,0.25) 32(4.25,0.75) 33(4.25,1.25) 34(4.25,1.75) 35(4.25,2.25) 36(4.25,2.75)
  rect 0.3x1.194 smd paste+0 mask+0.025: 13(-2.75,-4.25) 14(-2.25,-4.25) 15(-1.75,-4.25) 16(-1.25,-4.25) 17(-0.75,-4.25) 18(-0.25,-4.25) 19(0.25,-4.25) 20(0.75,-4.25) 21(1.25,-4.25) 22(1.75,-4.25) 23(2.25,-4.25) 24(2.75,-4.25) 37(2.75,4.25) 38(2.25,4.25) 39(1.75,4.25) 40(1.25,4.25) 41(0.75,4.25) 42(0.25,4.25) 43(-0.25,4.25) 44(-0.75,4.25) 45(-1.25,4.25) 46(-1.75,4.25) 47(-2.25,4.25) 48(-2.75,4.25)
  silkscreen extent -5.43,-5.35 5.35,5.35, body extent -4.5,-4.5 4.5,4.5, height 1.6
QSMD3.2x2.5 [mm] "Кварцевый резонатор"
  rect 1.05x1.3 smd: 1(0,0) 2(1.85,-2.3) 3(0,-2.3) 3(1.85,0)
  silkscreen extent -1.1,-1.18 2.18,0.1, body extent -0.32,-2.75 2.18,0.45, height 0.8
SMA_CONNECTOR [mm]
  round 1.508 hole 1: 1(0,0)
  round 1.92 hole 1.28: G1(-2.4,2.4) G2(-2.4,-2.4) G3(2.4,-2.4) G4(2.4,2.4)
  silkscreen extent -3.2,-3.2 3.2,3.2, body extent -3.25,-3.25 3.25,3.25, height 13.6
SOIC-8 [mm] "for operational amplifier"
  rect 1.45x0.6 smd: 1(-2.725,1.905)
  oval 1.45x0.6 smd: 2(-2.725,0.635) 3(-2.725,-0.635) 4(-2.725,-1.905) 5(2.725,-1.905) 6(2.725,-0.635) 7(2.725,0.635) 8(2.725,1.905)
  silkscreen extent -2.85,-2.5 1.6,2.88, body extent -3,-2.5 3,2.5, height 1.75
SOT223 [mm] "SOT223, ld1117"
  rect 2.15x0.9 smd: 1(-2.925,2.3) 2(-2.925,0) 3(-2.925,-2.3)
  rect 2.15x3.25 smd: 2(2.925,0)
  silkscreen extent -3.05,-3.35 1.55,3.43, body extent -3.56,-3.3 3.51,3.2, height 1.6
TC_A [mm] "Tantalum capacitor, type A,  1 pin - plus"
  rect 1.75x1.25 smd: 1(-1.325,0) 2(1.325,0)
  silkscreen extent -2.15,-0.97 1.7,1, body extent -1.73,-0.8 1.73,0.8, height 1.64
TSS-TD-19XA-XTR [mm]
  rect 1.1x1 smd: 1(-3.65,0) 2(3.65,0)
  silkscreen extent -3.1,-1.9 3.1,1.9, body extent -4.05,-1.85 4.05,1.85, height 2.55